# Altium PCB PCB_OuvrePorte_raspdim.PcbDoc
Units mm, origin at the board's own origin, x right, y up, seen from the top; angles counter-clockwise.
Board outline 93.76 x 55 mm, 2 copper layers (Top Layer, Bottom Layer); 39 components, 32 nets, 161 pads, 17 vias.
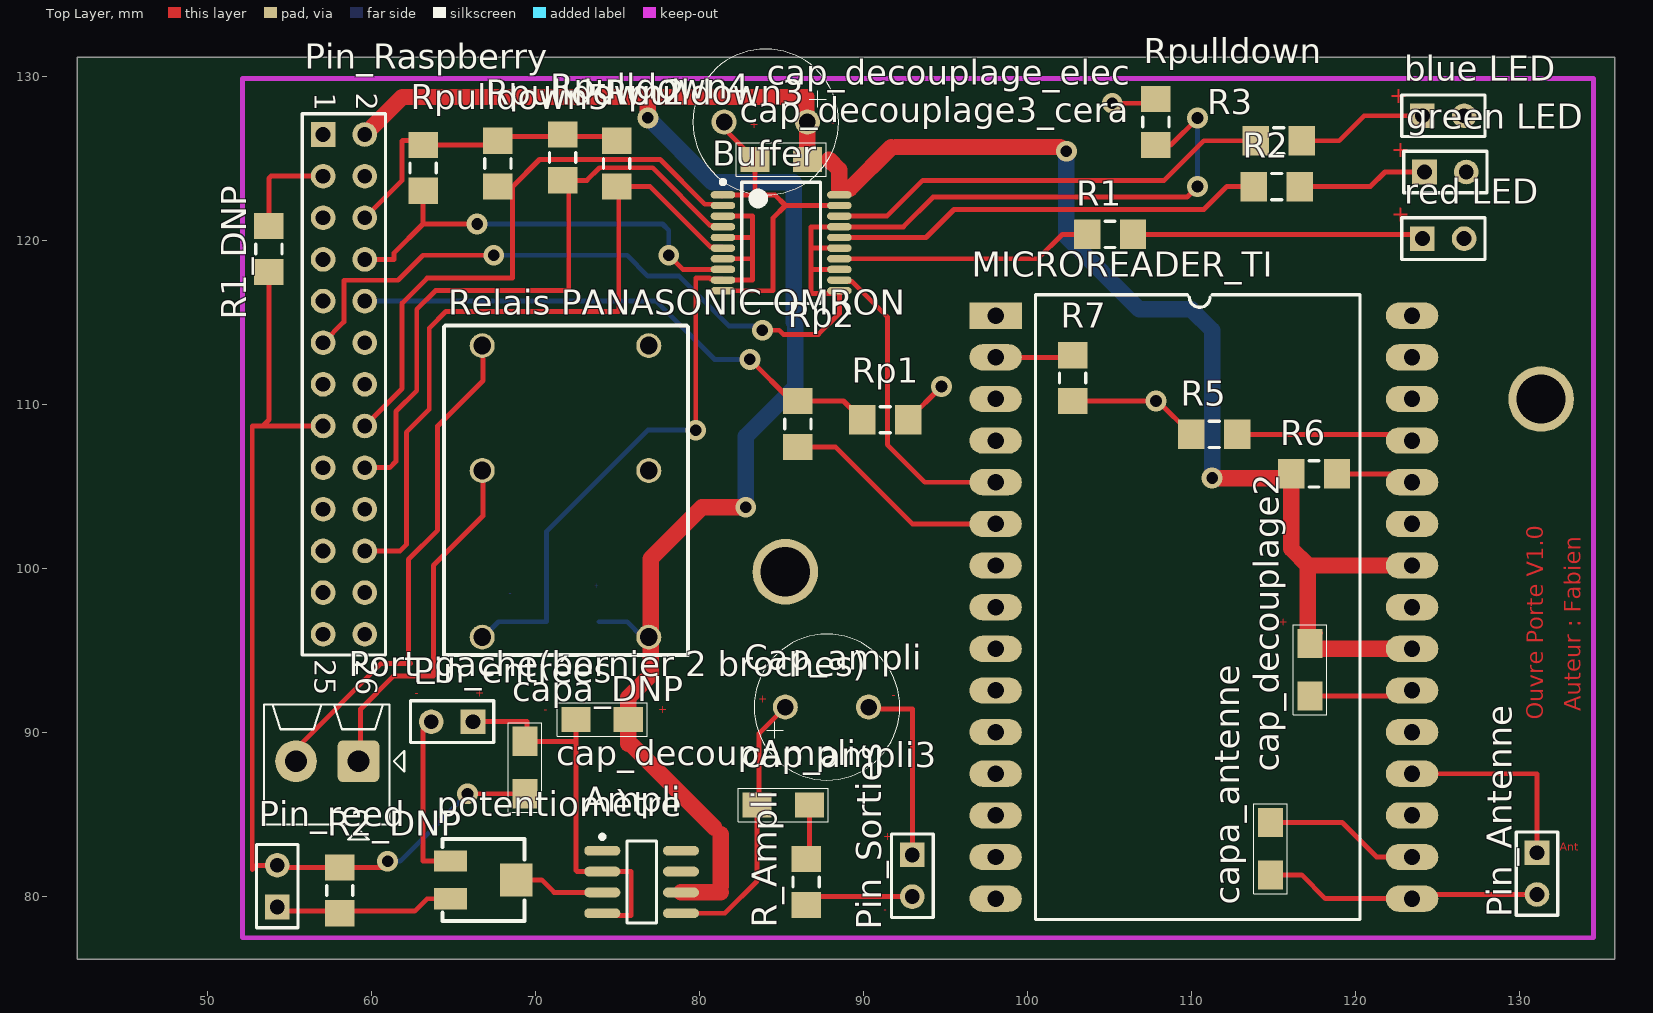
[diagram p0: Top Layer view]
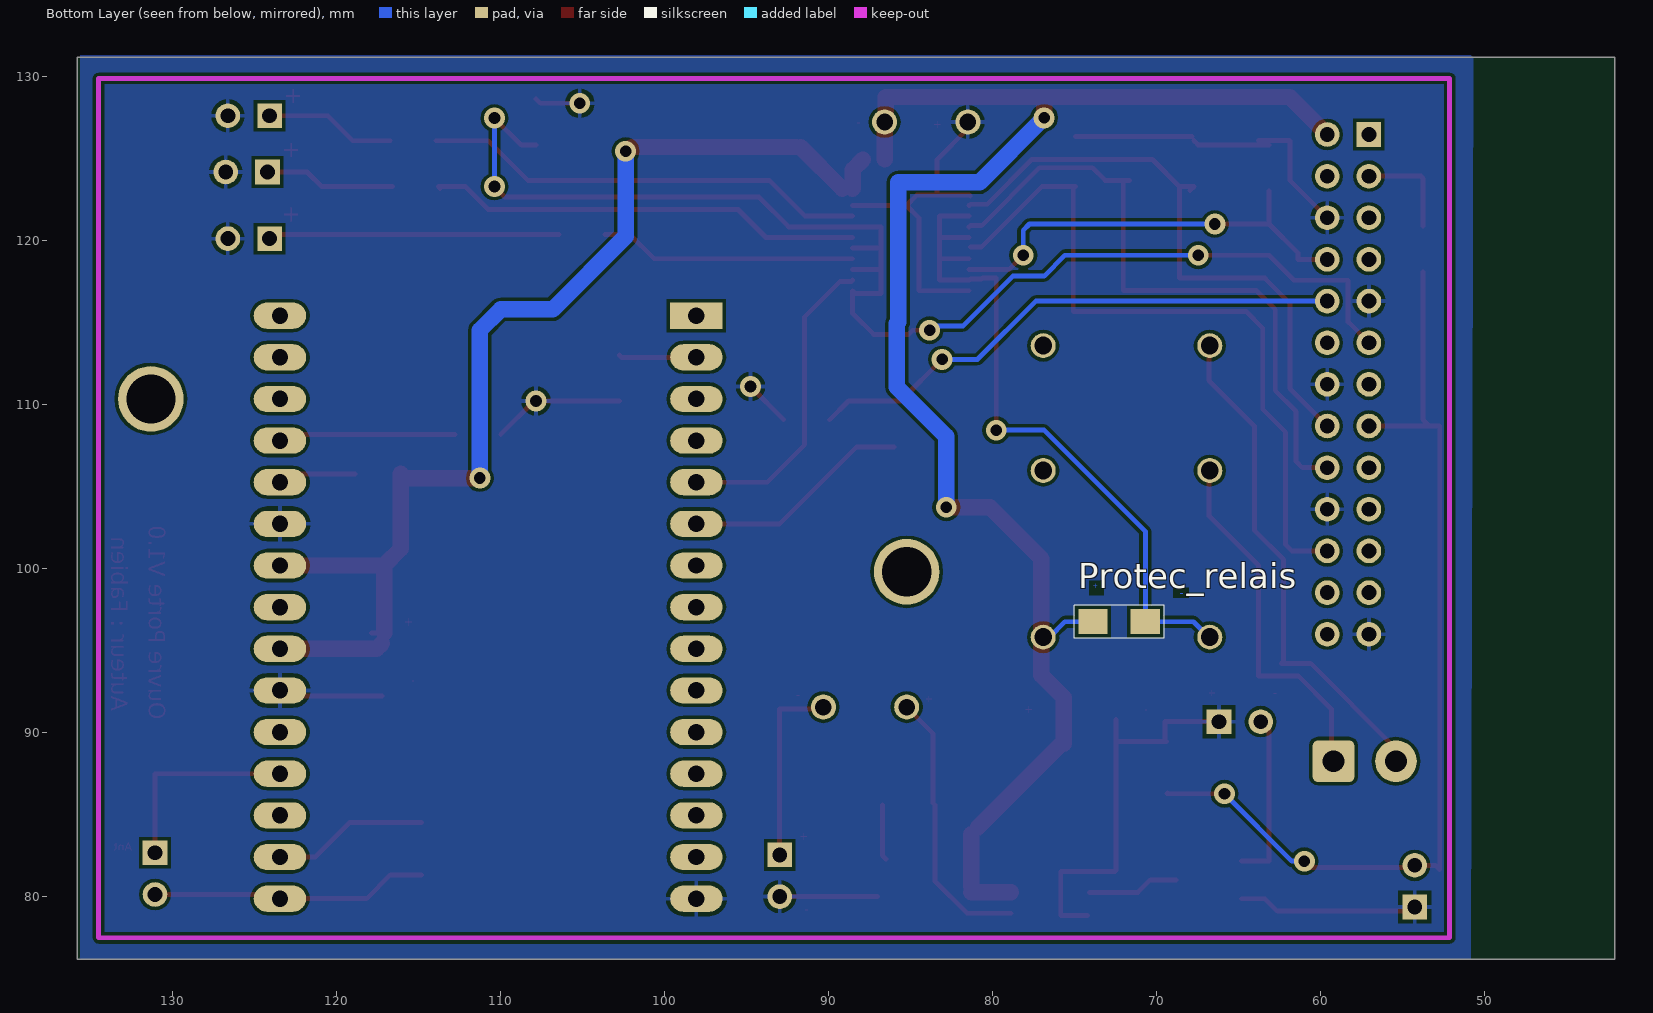
[diagram p1: Bottom Layer view, seen from below]

## Layer stack, top to bottom
Top Layer: signal copper 0.0356
Dielectric: dielectric 0.32, FR-4, Dk 4.8
Bottom Layer: signal copper 0.0356

## Board outline
42.037,76.2 135.8,76.2 135.8,131.2 42.037,131.2

## Design rules (kind name [scope] priority, off if disabled: settings)
AssemblyTestPointUsage [All] p1 off:
Clearance [All] p1: gap=0.2
FabricationTestPointUsage [All] p1 off: valid=0 allowmultiple=FALSE
HoleSize [InNetClass('Alim')] p1: absolutevalues=TRUE maxlimit=4 minlimit=0.025 maxpercent=80.000 minpercent=20.000
MinimumSolderMaskSliver [All] p1 off: minsoldermaskwidth=0.254
PolygonConnect [All] p1: connectstyle=Relief reliefconductorwidth=0.254 reliefentries=4 polygonreliefangle="90 Angle" airgapwidth=0.254
RoutingVias [All] p1: holewidth=0.6 width=1 viastyle="Through Hole" minholewidth=0.5 minwidth=1.27 maxholewidth=0.711 maxwidth=1.27
SilkToSilkClearance [All] p1 off: silktosilkclearance=0.254
SilkToSolderMaskClearance [IsPad] p1 off: minsilkscreentomaskgap=0.254 clearancetoexposedcopper=TRUE
SolderMaskExpansion [All] p1: expansion=0.102
Width [InNetClass('Alim')] p1: maxlimit=1 minlimit=0.3 preferedwidth=1
22 further rules are at their usual default settings.

## Classes and differential pairs
net class Alim: 5V

## Components (designator, comment, footprint, x,y, rotation, side; value= is the part's Value field where it differs from the comment)
Ampli "LM386M-1" M08A_N 76.454,80.899 r0 top
"blue LED" "Header 2" HDR1X2 124.079,127.635 r0 top
Buffer "74ACT244MSA" MSA20_L 84.963,119.888 r0 top
Cap_ampli "Cap Pol Alu" "Capacitor D300" 85.217,91.567 r0 top
cap_ampli3 "Cap" 1206 85.09,85.598 r180 top
cap_decoupAmpli "Cap Pol tantale" 1206 74.041,90.805 r180 top
cap_decouplage2 "Cap Pol tantale" 1206 117.221,93.853 r270 top
cap_decouplage3_cera "Cap ceramique" 1206 84.963,124.968 r180 top
cap_decouplage_elec "Cap Pol tantale" "Capacitor D300" 86.563,127.254 r180 top
capa_antenne "Cap" 1206 114.808,82.931 r270 top
capa_DNP "DNP" 1206 69.342,87.884 r90 top
"green LED" "Header 2" HDR1X2 124.206,124.206 r0 top
MICROREADER_TI "RI-STU-MRD1" DIP30 98.044,115.443 r0 top
Pin_Antenne "Header 2" HDR1X2 131.064,82.677 r270 top
Pin_entrées "Header 2" HDR1X2 66.167,90.678 r180 top
Pin_Raspberry "Header 13X2" HDR2X13 57.023,126.492 r270 top
Pin_reed "Header 2" HDR1X2 54.229,79.375 r90 top
Pin_Sorties "Header 2" HDR1X2 92.964,82.55 r270 top
"Port_gache(bornier 2 broches)" "Header 2H" 2P_PCB_ScrewTerm_90S_3.81MM 59.182,88.265 r90 top
potentiomètre "RPot SM 10K" POT4MM-2 66.802,81.026 r0 top
Protec_relais "Diode 1N4148" 1206 72.263,96.774 r0 bottom
R1 "Rr" 8-1206 105.029,120.396 r0 top
R1_DNP "DNP" 8-1206 53.721,119.507 r90 top
R2 "Rg" 8-1206 115.189,123.317 r0 top
R2_DNP "DNP" 8-1206 58.039,80.391 r90 top
R3 "Rb" 8-1206 115.316,126.111 r0 top
R5 "Rr" 8-1206 111.379,108.204 r0 top
R6 "Rr" 8-1206 117.475,105.791 r0 top
R7 "Rr" 8-1206 102.743,111.633 r270 top
R_Ampli "Rr" 8-1206 86.487,80.899 r90 top
"red LED" "Header 2" HDR1X2 124.079,120.142 r0 top
"Relais PANASONIC OMRON" "Relay" "layout Relais" 64.389,94.742 r90 top
Rp1 "" 8-1206 91.313,109.093 r180 top
Rp2 "Rr" 8-1206 85.979,108.839 r270 top
Rpulldown "" 8-1206 107.823,127.254 r270 top
Rpulldown2 "" 8-1206 67.691,124.714 r270 top
Rpulldown3 "" 8-1206 74.93,124.714 r270 top
Rpulldown4 "" 8-1206 71.628,125.095 r270 top
Rpulldown5 "" 8-1206 63.119,124.46 r270 top

## Footprints (in the part's own frame and the unit in brackets; to place one, negate y for a bottom-side part, rotate by r counter-clockwise, add the part's x,y. Pads: shape width x height; smd on the part's side, far side on the other; paste and mask are expansions set on the pad)
2P_PCB_ScrewTerm_90S_3.81MM [mil] "TERM BLOCK 2POS SIDE ENT STACKABLE 3.81MM"
  rrect25% 100x100 hole 52: 1(0,0)
  round 100 hole 52: 2(0,150)
  silkscreen extent -188,-110 136,226, body extent -152,-75 136,225, height 335
8-1206 [mm] "Chip Resistor; Body 3.1 x 1.6 mm (LxW typ)"
  rect 1.6x1.8 smd: 1(-1.4,0) 2(1.4,0)
  silkscreen extent -0.3,-0.8 0.3,0.8
1206 [mil]
  rect 70x60 smd: 1(-63,0) 2(63,0)
  silkscreen extent -108,-40 108,40
"Capacitor D300" [mil]
  round 60 hole 40: 1(0,0) 2(200,0)
  silkscreen extent -75,-175 275,175
DIP30 [mm]
  rect 3.2x1.6 hole 1: 1(0,0)
  oval 3.2x1.6 hole 1: 2(0,-2.54) 3(0,-5.08) 4(0,-7.62) 5(0,-10.16) 6(0,-12.7) 7(0,-15.24) 8(0,-17.78) 9(0,-20.32) 10(0,-22.86) 11(0,-25.4) 12(0,-27.94) 13(0,-30.48) 14(0,-33.02) 15(0,-35.56) 16(25.4,-35.56) 17(25.4,-33.02) 18(25.4,-30.48) 19(25.4,-27.94) 20(25.4,-25.4) 21(25.4,-22.86) 22(25.4,-20.32) 23(25.4,-17.78) 24(25.4,-15.24) 25(25.4,-12.7) 26(25.4,-10.16) 27(25.4,-7.62) 28(25.4,-5.08) 29(25.4,-2.54) 30(25.4,0)
  silkscreen extent 2.43,-36.83 22.22,1.27
HDR1X2 [mm] "Connector; Header; 2 Position"
  rect 1.5x1.5 hole 0.9: 1(0,0)
  round 1.5 hole 0.9: 2(2.54,0)
  silkscreen extent -1.27,-1.27 3.81,1.27
HDR2X13 [mm] "Connector; Header; 13x2 Position"
  rect 1.5x1.5 hole 0.9: 1(0,0)
  round 1.5 hole 0.9: 2(0,2.54) 3(2.54,0) 4(2.54,2.54) 5(5.08,0) 6(5.08,2.54) 7(7.62,0) 8(7.62,2.54) 9(10.16,0) 10(10.16,2.54) 11(12.7,0) 12(12.7,2.54) 13(15.24,0) 14(15.24,2.54) 15(17.78,0) 16(17.78,2.54) 17(20.32,0) 18(20.32,2.54) 19(22.86,0) 20(22.86,2.54) 21(25.4,0) 22(25.4,2.54) 23(27.94,0) 24(27.94,2.54) 25(30.48,0) 26(30.48,2.54)
  silkscreen extent -1.27,-1.27 31.75,3.81
"layout Relais" [mm]
  round 1.524 hole 1.09: 1(11.25,-2.34) 2(11.25,-12.5) 3(18.87,-2.34) 4(1.09,-12.5) 5(1.09,-2.34) 6(18.87,-12.5)
  silkscreen extent 0,-14.9 20.1,0
M08A_N [mm] "SOIC, 8-Leads, Body 4.9x3.9mm, Pitch 1.27mm, IPC Medium Density"
  oval 2.2x0.6 smd: 1(-2.4,1.905) 2(-2.4,0.635) 3(-2.4,-0.635) 4(-2.4,-1.905) 5(2.4,-1.905) 6(2.4,-0.635) 7(2.4,0.635) 8(2.4,1.905)
  silkscreen extent -2.52,-2.5 0.9,2.88, body extent -2,-2.5 2,2.5, height 1.75
MSA20_L [mm] "SOP, 20-Leads, Body 7.3x5.3mm, Pitch 0.65mm, IPC High Density"
  oval 1.5x0.45 smd: 1(-3.55,2.925) 2(-3.55,2.275) 3(-3.55,1.625) 4(-3.55,0.975) 5(-3.55,0.325) 6(-3.55,-0.325) 7(-3.55,-0.975) 8(-3.55,-1.625) 9(-3.55,-2.275) 10(-3.55,-2.925) 11(3.55,-2.925) 12(3.55,-2.275) 13(3.55,-1.625) 14(3.55,-0.975) 15(3.55,-0.325) 16(3.55,0.325) 17(3.55,0.975) 18(3.55,1.625) 19(3.55,2.275) 20(3.55,2.925)
  silkscreen extent -3.67,-3.7 2.4,3.82, body extent -2.68,-3.7 2.68,3.7, height 2.02
POT4MM-2 [mm] "Square Trimming Potentiometer"
  rect 2x1.3 smd: CCW(-2,-1.15) CW(-2,1.15)
  rect 2x2 smd: W(2,0)
  silkscreen extent -2.5,-2.5 2.5,2.5

## Part data
Ampli: "Low Voltage Audio Power Amplifier, 8-pin Narrow SOIC"
"blue LED" "green LED" Pin_Antenne Pin_entrées Pin_reed Pin_Sorties "red LED": "Header, 2-Pin"
Buffer: "Octal Buffer/Line Driver with 3-State Output"
Cap_ampli cap_decoupAmpli cap_decouplage2 cap_decouplage_elec: library part "Cap Pol1", "Polarized Capacitor (Radial)"
cap_ampli3 capa_antenne: "Capacitor"
cap_decouplage3_cera capa_DNP: library part Cap, "Capacitor"
MICROREADER_TI: library part Component_1
Pin_Raspberry: "Header, 13-Pin, Dual row"
"Port_gache(bornier 2 broches)": "Header, 2-Pin, Right Angle"
potentiomètre: library part "RPot SM", "Square Trimming Potentiometer"
Protec_relais: "High Conductance Fast Diode"
R1 R1_DNP R2 R2_DNP R3 R5 R6 R7 R_Ampli Rp1 Rp2 Rpulldown Rpulldown2 Rpulldown3 Rpulldown4 Rpulldown5: library part Res1, "Resistor"
"Relais PANASONIC OMRON": "SPDT Relay"

## Free pads (board coordinates)
  round 4 hole 3: 0(85.217,99.822) 1(131.318,110.363)

## Via types
v1: diameter 1.27, hole 0.711, Top Layer to Bottom Layer, 17 vias

## Nets (pads, with @x,y where several pads share a name; then routed paths per layer and width w, separated by ;. In a path a pad name is that pad's centre, name@x,y a point inside that pad or via, vN(x,y) a via of type N, cw(c..) or ccw(c..) an arc to the next point about the centre after c; other vN are vias at no path point)
5V: "Relais PANASONIC OMRON.4" Ampli.6 Buffer.20 cap_decoupAmpli.1 cap_decouplage2.1 cap_decouplage3_cera.1 cap_decouplage_elec.1 MICROREADER_TI.22 MICROREADER_TI.24 Pin_Raspberry.2 Protec_relais.2 R6.1 | length 169.7
  Top Layer w0.3: 76.708,128.778 76.835,128.651 ; Ampli.6 Ampli.6@78.981,80.391 ; cap_decouplage_elec.1@86.487,127.94 cap_decouplage_elec.1@86.741,127.686 ; cap_decouplage2.1@117.094,96.088 cap_decouplage2.1@117.856,96.088
  Top Layer w1: Pin_Raspberry.2 61.849,128.778 76.708,128.778 86.487,128.778 cap_decouplage_elec.1@86.487,127.94 ; 75.641,89.332 75.641,92.151 76.999,93.509 76.999,100.621 80.137,103.759 v1(82.804,103.759) ; 75.895,89.205 80.899,84.201 ; v1(76.835,127.508) 76.835,128.651 ; Ampli.6 81.28,80.264 ; 81.28,80.645 81.28,83.82 ; cap_decouplage3_cera.1 cap_decouplage_elec.1@86.563,127.508 ; 87.884,124.968 88.513,124.339 88.513,123.196 88.519,123.19 ; 89.154,123.19 91.69,125.726 ; 91.948,125.73 v1@101.981,125.73 ; v1(111.252,105.537) 115.821,105.537 R6.1 116.075,101.222 117.094,100.203 ; cap_decouplage2.1@117.094,96.088 117.094,100.203 ; cap_decouplage2.1 117.551,95.123 MICROREADER_TI.22 ; MICROREADER_TI.24 117.094,100.203
  Bottom Layer w0.3: Protec_relais.2 75.565,96.774 76.507,95.832 76.999,95.832 77.089,95.742 ; 85.725,115.058 85.821,114.962
  Bottom Layer w1: v1(76.835,127.508) 80.772,123.571 85.725,123.571 85.725,115.058 ; v1(82.804,103.759) 82.804,108.077 85.821,111.094 85.821,114.962 ; v1(102.362,125.476) 102.362,120.269 106.807,115.824 109.982,115.824 111.252,114.554 v1(111.252,105.537)
GND: "blue LED.2" "green LED.2" "red LED.2" Ampli.2 Ampli.4 Buffer.1 Buffer.10 Buffer.19 cap_decoupAmpli.2 cap_decouplage2.2 cap_decouplage3_cera.2 cap_decouplage_elec.2 capa_DNP.2 MICROREADER_TI.15 MICROREADER_TI.21 MICROREADER_TI.25 Pin_entrées.1 Pin_Raspberry.6 Pin_Raspberry.9 Pin_Raspberry.14 Pin_Raspberry.20 Pin_Raspberry.25 Pin_reed.1 Pin_Sorties.2 potentiomètre.CCW R2_DNP.1 R5.1 R7.2 R_Ampli.1 Rp1.1 Rpulldown2.1 Rpulldown3.1 Rpulldown4.1 Rpulldown5.1 Rpulldown.1 | length 101.5
  Top Layer w0.3: Pin_reed.1 54.486,79.118 62.608,79.118 63.366,79.876 potentiomètre.CCW ; Pin_Raspberry.6 61.849,123.698 61.849,126.111 61.852,126.114 Rpulldown5.1@63.754,126.114 ; Rpulldown5.1 67.437,125.86 Rpulldown2.1 ; Pin_entrées.1 69.469,90.678 capa_DNP.2@69.469,89.56 ; Rpulldown2.1@67.818,126.365 Rpulldown3.1@74.93,126.365 ; capa_DNP.2@69.367,89.459 72.441,89.459 ; cap_decoupAmpli.2 72.441,89.459 ; Ampli.4@74.181,78.867 75.819,78.867 75.819,81.534 Ampli.2 72.517,81.534 72.441,81.61 72.441,89.459 ; Buffer.1@81.338,122.738 Buffer.1 83.312,122.813 ; Buffer.10 84.459,116.963 84.459,121.394 85.228,122.163 ; cap_decouplage_elec.2 81.483,126.848 cap_decouplage3_cera.2 83.363,122.864 83.312,122.813 ; R_Ampli.1@86.998,80.01 Pin_Sorties.2 ; Buffer.19 85.228,122.163 ; Rp1.1 v1(94.742,111.122) ; R7.2 102.746,110.236 v1(107.823,110.236) ; v1(105.156,128.397) 107.566,128.397 Rpulldown.1 ; v1@107.95,110.233 R5.1 ; cap_decouplage2.2 MICROREADER_TI.21@123.114,92.253 ; 83.312,122.813 84.578,122.813 85.228,122.163
NetAmpli_3: Ampli.3 potentiomètre.W | length 5.6
  Top Layer w0.3: potentiomètre.W 70.358,81.026 71.12,80.264 Ampli.3
NetAmpli_5: Ampli.5 cap_ampli3.2 Cap_ampli.1 | length 16.6
  Top Layer w0.3: Ampli.5 81.534,78.994 83.49,80.95 cap_ampli3.2 ; cap_ampli3.2@83.617,85.725 83.617,89.967 Cap_ampli.1
"Netblue LED_1": "blue LED.1" R3.2 | length 8
  Top Layer w0.3: R3.2 118.999,126.111 120.523,127.635 124.079,127.635
NetBuffer_2: Buffer.2 Pin_Raspberry.16 Rpulldown2.2 | length 37.3
  Top Layer w0.3: Pin_Raspberry.16 61.849,110.998 61.849,116.205 63.373,117.729 68.58,117.729 Rpulldown2.2@68.58,123.314 ; Rpulldown2.2@67.945,123.06 Rpulldown2.2 68.577,123.314 70.227,124.964 77.587,124.964 80.313,122.238 81.338,122.238 Buffer.2
NetBuffer_3: "Relais PANASONIC OMRON.5" Buffer.3 Buffer.5 Buffer.7 Buffer.9 Protec_relais.1 | length 43.5
  Top Layer w0.3: v1(79.756,108.458) 79.756,117.729 80.609,117.729 80.65,117.688 81.338,117.688 Buffer.9 83.196,117.613 83.211,117.628 83.211,118.872 ; Buffer.7 83.17,118.913 83.211,118.872 ; Buffer.5 83.155,120.213 83.211,120.269 ; Buffer.3 83.211,121.513 83.211,120.269 ; 83.211,118.872 83.211,120.269
  Bottom Layer w0.3: 66.779,95.832 67.721,96.774 Protec_relais.1 70.663,102.286 76.835,108.458 v1(79.756,108.458)
NetBuffer_4: Buffer.4 Pin_Raspberry.18 Rpulldown4.2 | length 39.9
  Top Layer w0.3: Pin_Raspberry.18 61.087,106.172 61.468,106.553 61.468,109.601 62.738,110.871 62.738,115.824 63.881,116.967 72.009,116.967 Rpulldown4.2@72.009,123.695 ; Rpulldown4.2 Rpulldown4.2@72.009,123.695 ; Buffer.4 81.338,120.938 80.65,120.938 77.124,124.464 73.885,124.464 73.116,123.695 Rpulldown4.2@72.009,123.695
NetBuffer_6: Buffer.6 Pin_Raspberry.22 Rpulldown3.2 | length 44
  Top Layer w0.3: Pin_Raspberry.22 61.722,101.092 62.103,101.473 62.103,108.331 63.5,109.728 63.5,114.681 64.516,115.697 75.057,115.697 Rpulldown3.2@75.057,123.314 ; Rpulldown3.2 Rpulldown3.2@75.057,123.314 ; Buffer.6@81.338,119.638 80.65,119.638 76.974,123.314 Rpulldown3.2@75.057,123.314
NetBuffer_11: Buffer.11 Buffer.13 Buffer.15 Buffer.17 Pin_Raspberry.11 Rpulldown.2 | length 80.4
  Top Layer w0.3: Pin_Raspberry.11 58.293,115.062 58.293,117.602 61.595,117.602 63.119,119.126 v1(67.437,119.126) ; v1(83.82,114.554) 84.836,114.554 85.09,114.3 87.237,114.3 88.513,115.576 Buffer.11 88.349,116.799 86.782,116.799 86.782,118.237 ; Buffer.13 86.808,118.263 86.782,118.237 ; Buffer.15 86.795,119.563 86.782,119.55 ; Rpulldown.2 108.722,125.854 v1(110.363,127.495) ; v1(110.363,123.317) 109.728,122.682 94.234,122.682 92.415,120.863 Buffer.17 86.782,120.863 86.782,119.55 ; 86.782,118.237 86.782,119.55
  Bottom Layer w0.3: v1(67.437,119.126) 75.565,119.126 76.835,117.856 78.74,117.856 81.788,114.808 83.566,114.808 v1(83.82,114.554) ; v1(110.363,123.317) v1(110.363,127.495)
NetBuffer_12: Buffer.12 MICROREADER_TI.5 | length 19.2
  Top Layer w0.3: Buffer.12 88.588,117.538 89.276,117.538 91.44,115.374 91.44,107.569 93.726,105.283 MICROREADER_TI.5
NetBuffer_14: Buffer.14 R1.1 | length 15.7
  Top Layer w0.3: Buffer.14 100.625,118.913 102.108,120.396 R1.1
NetBuffer_16: Buffer.16 R2.1 | length 26.7
  Top Layer w0.3: Buffer.16 93.797,120.213 95.504,121.92 110.744,121.92 112.141,123.317 R2.1 R2.1@113.67,123.198
NetBuffer_18: Buffer.18 R3.1 | length 27.3
  Top Layer w0.3: Buffer.18 91.414,121.513 93.599,123.698 108.331,123.698 110.744,126.111 R3.1
Netcap_ampli3_1: cap_ampli3.1 R_Ampli.2 | length 3.4
  Top Layer w0.3: R_Ampli.2 86.69,82.502 cap_ampli3.1
Netcap_ampli_2: Cap_ampli.2 Pin_Sorties.1 | length 11.6
  Top Layer w0.3: Cap_ampli.2 90.424,91.44 92.964,91.44 Pin_Sorties.1
Netcapa_antenne_1: capa_antenne.1 MICROREADER_TI.17 | length 9.5
  Top Layer w0.3: capa_antenne.1 119.177,84.531 121.285,82.423 MICROREADER_TI.17
Netcapa_antenne_2: capa_antenne.2 MICROREADER_TI.16 Pin_Antenne.2 | length 16.6
  Top Layer w0.3: capa_antenne.2 116.713,81.331 118.161,79.883 MICROREADER_TI.16 ; MICROREADER_TI.16@123.698,80.137 Pin_Antenne.2
Netcapa_DNP_1: capa_DNP.1 Pin_Raspberry.15 Pin_reed.2 R1_DNP.1 R2_DNP.2 | length 59.5
  Top Layer w0.3: R1_DNP.1 53.721,109.093 53.34,108.712 ; Pin_Raspberry.15 53.34,108.712 ; v1@60.582,81.791 R2_DNP.2 54.353,81.791 Pin_reed.2 52.959,81.915 52.705,81.661 52.705,108.712 53.34,108.712 ; v1@60.703,81.915 v1@60.706,81.918 ; v1(65.835,86.284) capa_DNP.1@69.252,86.284 ; capa_DNP.1@69.297,86.329 capa_DNP.1
  Bottom Layer w0.3: v1(60.96,82.169) 61.72,82.169 v1(65.835,86.284) v1@65.489,86.63
"Netgreen led_1": "green LED.1" R2.2 | length 8
  Top Layer w0.3: R2.2 120.904,123.317 121.793,124.206 124.206,124.206
NetMICROREADER_TI_2: MICROREADER_TI.2 R7.1 | length 4.8
  Top Layer w0.3: MICROREADER_TI.2 102.613,112.903 R7.1
NetMICROREADER_TI_6: MICROREADER_TI.6 Rp2.2 | length 14
  Top Layer w0.3: Rp2.2 88.268,107.439 92.964,102.743 MICROREADER_TI.6
NetMICROREADER_TI_19: MICROREADER_TI.19 Pin_Antenne.1 | length 12.4
  Top Layer w0.3: MICROREADER_TI.19 131.064,87.503 Pin_Antenne.1
NetMICROREADER_TI_26: MICROREADER_TI.26 R6.2 | length 4.8
  Top Layer w0.3: R6.2 122.936,105.791 MICROREADER_TI.26
NetMICROREADER_TI_27: MICROREADER_TI.27 R5.2 | length 10.8
  Top Layer w0.3: R5.2 123.063,108.204 MICROREADER_TI.27
NetPin_entrées_2: Pin_entrées.2 potentiomètre.CW | length 10.4
  Top Layer w0.3: Pin_entrées.2 63.126,90.177 63.126,82.176 potentiomètre.CW
NetPin_Raspberry_3: Pin_Raspberry.3 R1_DNP.2 | length 6.3
  Top Layer w0.3: R1_DNP.2 53.721,123.825 53.848,123.952 Pin_Raspberry.3
"NetPort_gache(bornier 2 broches)_1": "Port_gache(bornier 2 broches).1" "Relais PANASONIC OMRON.1" | length 21.5
  Top Layer w0.3: 59.309,89.027 59.309,91.44 61.341,93.472 63.754,93.472 63.754,100.203 66.779,103.228 66.779,105.992
"NetPort_gache(bornier 2 broches)_2": "Port_gache(bornier 2 broches).2" "Relais PANASONIC OMRON.3" | length 29.6
  Top Layer w0.3: 55.499,89.027 55.499,89.154 60.579,94.234 62.357,94.234 62.23,94.361 62.23,100.584 64.008,102.362 64.008,108.712 66.779,111.483 66.779,112.842
NetR1_2: "red LED.1" R1.2 | length 17.8
  Top Layer w0.3: R1.2 123.825,120.396 124.079,120.142
RXD: Pin_Raspberry.10 Rp1.2 Rp2.1 | length 33.5
  Top Layer w0.3: Pin_Raspberry.10 Pin_Raspberry.10@59.69,116.459 ; v1(83.058,112.776) 85.595,110.239 Rp2.1 88.767,110.239 Rp1.2
  Bottom Layer w0.3: Pin_Raspberry.10 77.343,116.332 80.899,112.776 v1(83.058,112.776)
TXD: Buffer.8 Pin_Raspberry.8 Rpulldown5.2 | length 27
  Top Layer w0.3: Pin_Raspberry.8 61.341,118.872 61.341,119.253 63.119,121.031 ; Rpulldown5.2 63.119,121.031 ; v1(66.421,121.031) 63.119,121.031 ; v1(78.105,119.126) 78.968,118.263 Buffer.8
  Bottom Layer w0.3: v1(66.421,121.031) 77.724,121.031 78.105,120.65 v1(78.105,119.126)
pads on no net: "Relais PANASONIC OMRON.2" "Relais PANASONIC OMRON.6" Ampli.1 Ampli.7 Ampli.8 MICROREADER_TI.1 MICROREADER_TI.3 MICROREADER_TI.4 MICROREADER_TI.7 MICROREADER_TI.8 MICROREADER_TI.9 MICROREADER_TI.10 MICROREADER_TI.11 MICROREADER_TI.12 MICROREADER_TI.13 MICROREADER_TI.14 MICROREADER_TI.18 MICROREADER_TI.20 MICROREADER_TI.23 MICROREADER_TI.28 MICROREADER_TI.29 MICROREADER_TI.30 Pin_Raspberry.1 Pin_Raspberry.4 Pin_Raspberry.5 Pin_Raspberry.7 Pin_Raspberry.12 Pin_Raspberry.13 Pin_Raspberry.17 Pin_Raspberry.19 Pin_Raspberry.21 Pin_Raspberry.23 Pin_Raspberry.24 Pin_Raspberry.26

## Polygon pours and split planes (outlines as drawn)
GND on Bottom Layer "Bottom Layer-GND" (solid, pour order 2): 50.673,131.191 50.8,131.318 135.636,131.318 135.636,76.327 135.763,76.2 50.8,76.2

## Keep-outs
Keep-Out Layer:
  lines w0.3: 52.1,77.5 52.1,129.9 134.5,129.9 134.5,77.5 52.1,77.5

## Other copper
Top Layer:
  text "+" at 122.047,128.397 h1
  text "-" at 88.011,127 h0.5
  text "+" at 83.058,126.873 h0.5
  text "+" at 122.174,125.095 h1
  text "+" at 122.174,121.158 h1
  text "+" at 115.316,96.52 h0.5
  text "-" at 115.189,92.964 h0.5
  text "-" at 62.611,92.202 h0.5
  text "+" at 66.294,92.202 h0.5
  text "-" at 91.694,92.075 h0.5
  text "+" at 83.566,91.821 h0.5
  text "Auteur : Fabien" at 133.731,91.313 h1 r90
  text "-" at 70.485,91.186 h0.5
  text "+" at 77.47,91.186 h0.5
  text "Ouvre Porte V1.0" at 131.445,90.805 h1 r90
  text "+" at 91.186,83.439 h0.5
  text "Ant" at 132.461,82.804 h0.5
  text "-" at 91.186,78.994 h0.5
Bottom Layer:
  text "+" at 73.533,98.679 h0.5
  text "-" at 68.326,98.298 h0.5

## Silkscreen, mask and mechanical layers (free items; w line width, h text height)
Mechanical 2:
  the board outline again, w1

## Dimensions
52.1,77.5 to 52.1,129.9 on Mechanical 1
52.1,77.5 to 134.5,77.5 on Mechanical 1

## Text inside footprints (layer, text, board x,y; h text height)
Pin_Raspberry: Top Overlay "26" at 59.055,94.488 h1.27 r270; Top Overlay "25" at 56.515,94.488 h1.27 r270; Top Overlay "1" at 56.515,129.032 h1.27 r270; Top Overlay "2" at 59.055,129.032 h1.27 r270